# EAGLE board PR9001 (EAGLE 6.6.0)
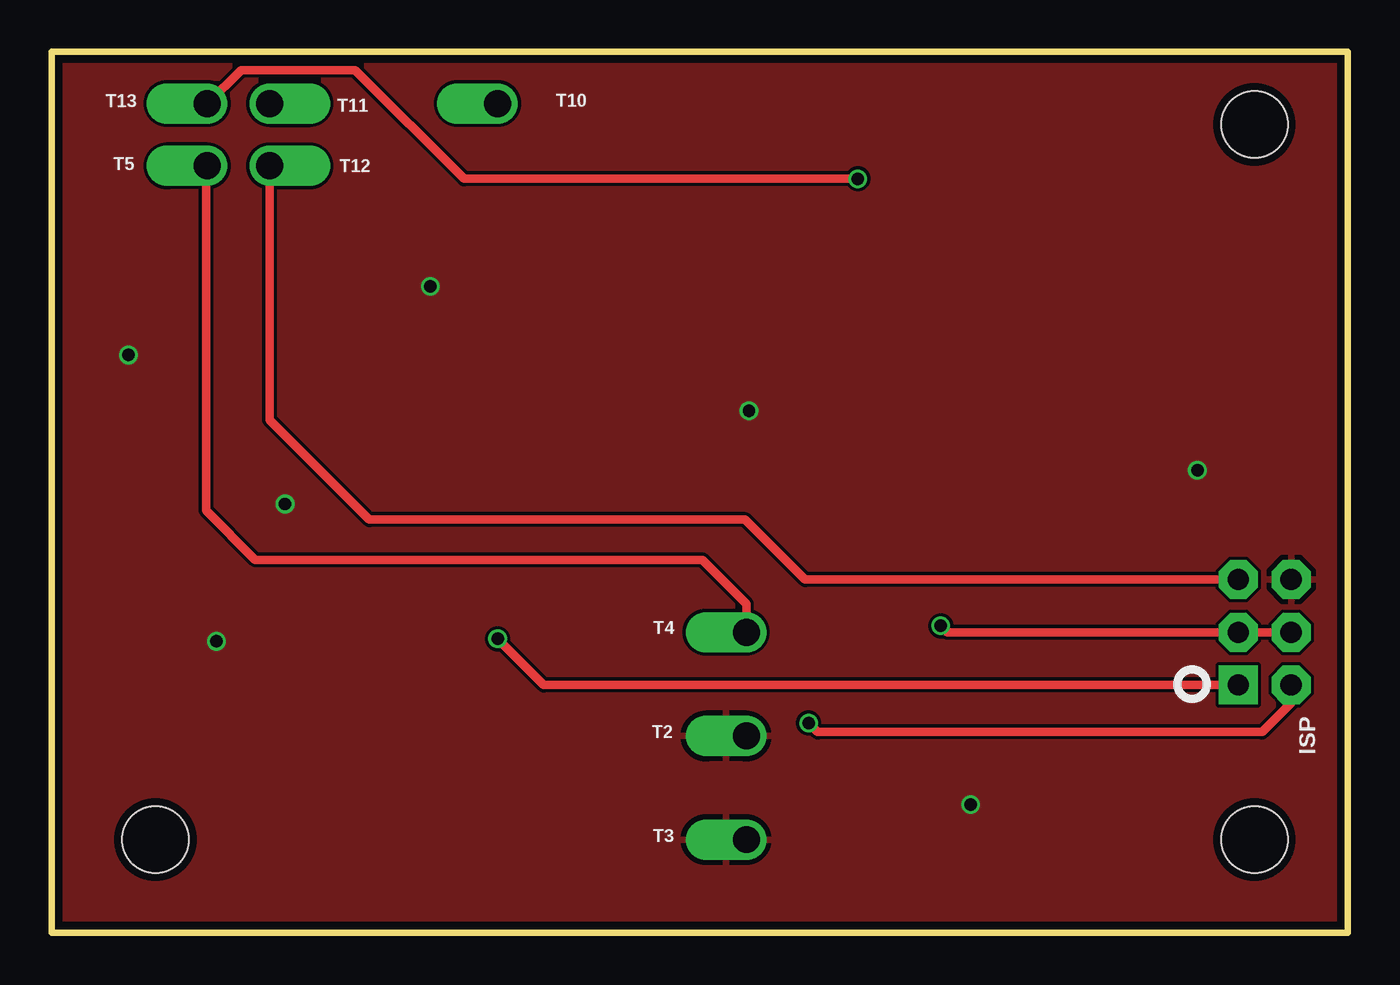
[diagram p0: board, top side]
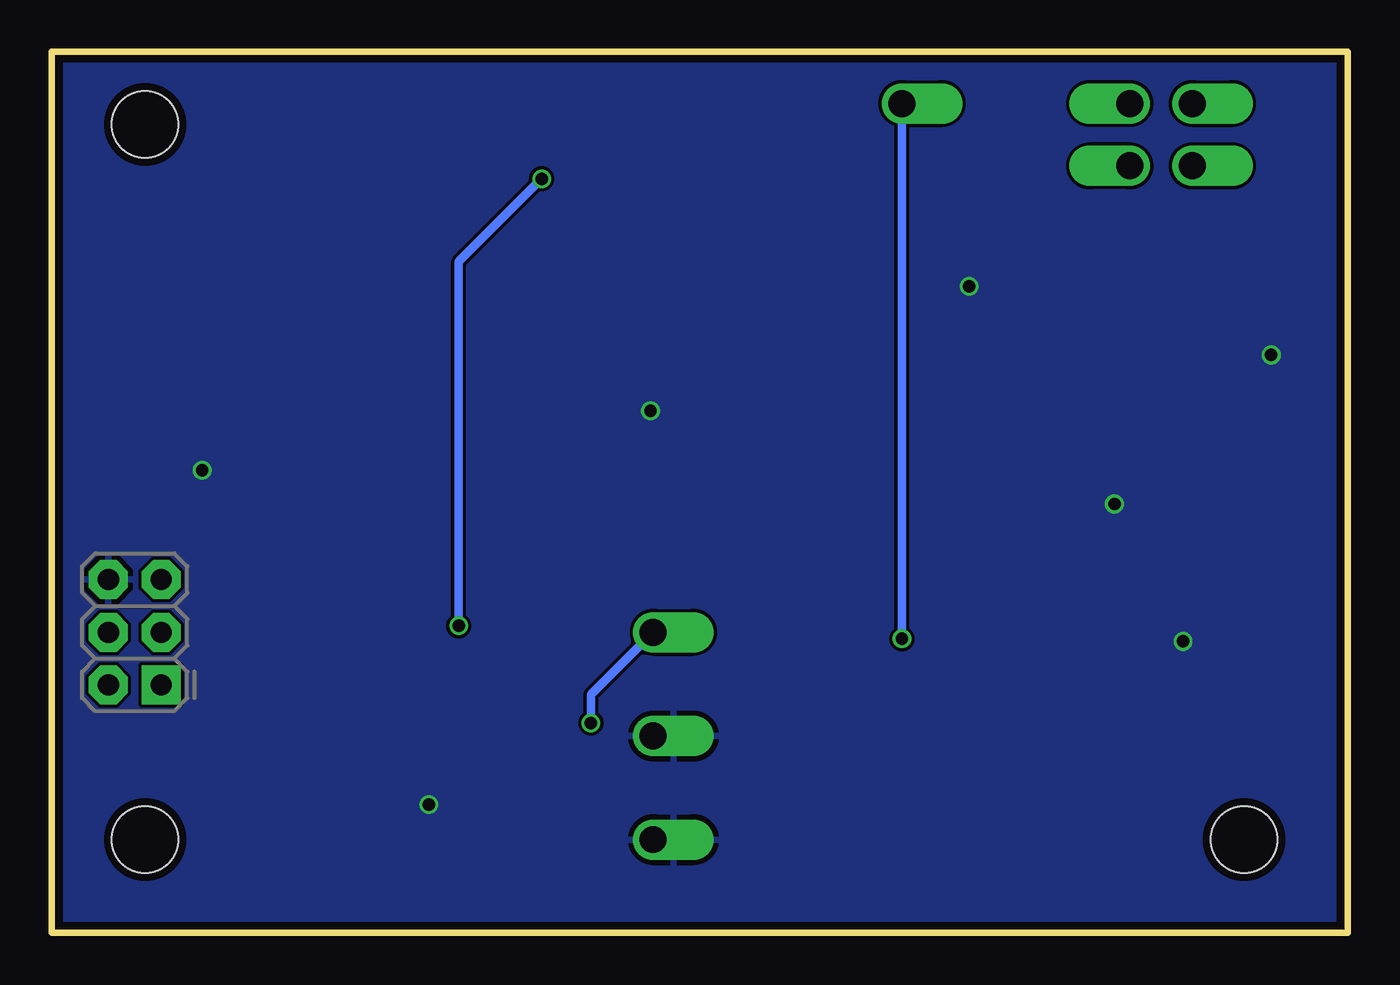
[diagram p1: board, bottom side, seen from below]

Size 62.5 x 42.5 mm. Coordinates in mm from the lower left corner, seen from the top.
Outline: 0,42.5 62.5,42.5 62.5,0 0,0 0,42.5
Copper layers (1*16): Top 0.0356mm / dielectric 1.5011mm / Bottom 0.0356mm
Design rules "LaenPCBOrder *": minimum track width 6mil, minimum drill 13mil, track to track 6mil, track to pad 6mil, pad to pad 6mil, via to via 6mil, smd to smd 6mil, copper to edge 15mil, drill to drill 6mil, minimum pad ring 7mil, minimum via ring 5mil, stop-mask expansion 3mil, vias tented up to drill 0mil, thermal gap 10mil
Net classes: 1 antenna: clearance 1.27 mm
Holes 3.2 mm at 5,4.5 58,4.5 58,39

## Footprints (pad centres in the part's own frame; a part is rotated, then mirrored left to right if it is on the bottom)
2X3-NS = drill 1.016 pad 1.88 square: 1 -2.54,-1.27 | drill 1.016 pad 1.88 octagon: 2 -2.54,1.27; 3 0,-1.27; 4 0,1.27; 5 2.54,-1.27; 6 2.54,1.27
PR9001_TESTPOINT = drill 1.3 pad 1.3 offset: P$1 0,0

## Placement (x,y rotation side)
ISP  [2X3-NS]  58.5,14.5 90 bottom
T2  PR9001_TESTPOINT  [PR9001_TESTPOINT]  33.5,9.5 0 bottom
T3  PR9001_TESTPOINT  [PR9001_TESTPOINT]  33.5,4.5 0 bottom
T4  PR9001_TESTPOINT  [PR9001_TESTPOINT]  33.5,14.5 0 bottom
T5  PR9001_TESTPOINT  [PR9001_TESTPOINT]  7.5,37 0 bottom
T10  PR9001_TESTPOINT  [PR9001_TESTPOINT]  21.5,40 0 bottom
T11  PR9001_TESTPOINT  [PR9001_TESTPOINT]  10.5,40 180 bottom
T12  PR9001_TESTPOINT  [PR9001_TESTPOINT]  10.5,37 180 bottom
T13  PR9001_TESTPOINT  [PR9001_TESTPOINT]  7.5,40 0 bottom

## Library data of the parts
ISP = PR_Parts_Library; MFG_PN: M20-9980346
T2-T5 T10-T13 = PR_Parts_Library

## Nets
!RST: ISP.1 T10.P$1
GND: ISP.6 T2.P$1 T3.P$1
RESET: ISP.5 T12.P$1
SCLK: T11.P$1
SDIO: ISP.4 T13.P$1
VCC: ISP.2 T4.P$1 T5.P$1

## Tracks (layer width: path | path; a pad name or v marks a point on that pad's centre or on a via)
!RST  (via drill 0.6)
  Top 0.406: ISP.1 23.73,11.96 v21.5,14.19
  Bottom 0.406: v21.5,14.19 T10.P$1
GND  (via drill 0.6)
  other vias: 3.69,27.88 18.25,31.19 11.25,20.69 7.94,14.06 55.25,22.31 33.62,25.19 44.31,6.19
  pour Bottom: 0.06,42.56 63,42.81 62.88,-0.5 -0.06,-0.75
  pour Top: -0.06,42.62 62.75,42.5 62.75,-0.75 -0.06,-0.75
N$21
  pour Bottom: 
RESET
  Top 0.406: ISP.5 36.34,17.04 33.44,19.94 15.31,19.94 10.5,24.75 T12.P$1
SDIO  (via drill 0.6)
  Top 0.406: ISP.4 43.19,14.5 v42.88,14.81 | v38.88,36.38 19.88,36.38 14.62,41.62 9.12,41.62 T13.P$1
  Bottom 0.406: v42.88,14.81 42.88,32.38 v38.88,36.38
VCC  (via drill 0.6)
  Top 0.406: ISP.2 59.77,11.08 58.38,9.69 36.94,9.69 v36.5,10.12 | T4.P$1 33.5,15.88 31.38,18 9.81,18 7.44,20.38 7.44,36.94 T5.P$1
  Bottom 0.406: T5.P$1 7.38,37 | v36.5,10.12 36.5,11.5 T4.P$1